# Altium PCB PlatypusDAQ.PcbDoc (part 2 of 2)
Units mil, origin at the board's own origin, x right, y up, seen from the top; angles counter-clockwise.
Board outline 10000 x 4000 mil, 4 copper layers (Top Layer, POWER, GND, Bottom Layer); 258 components, 327 nets, 1659 pads, 184 vias.
Unrouted connection lines stored in the file: 960.
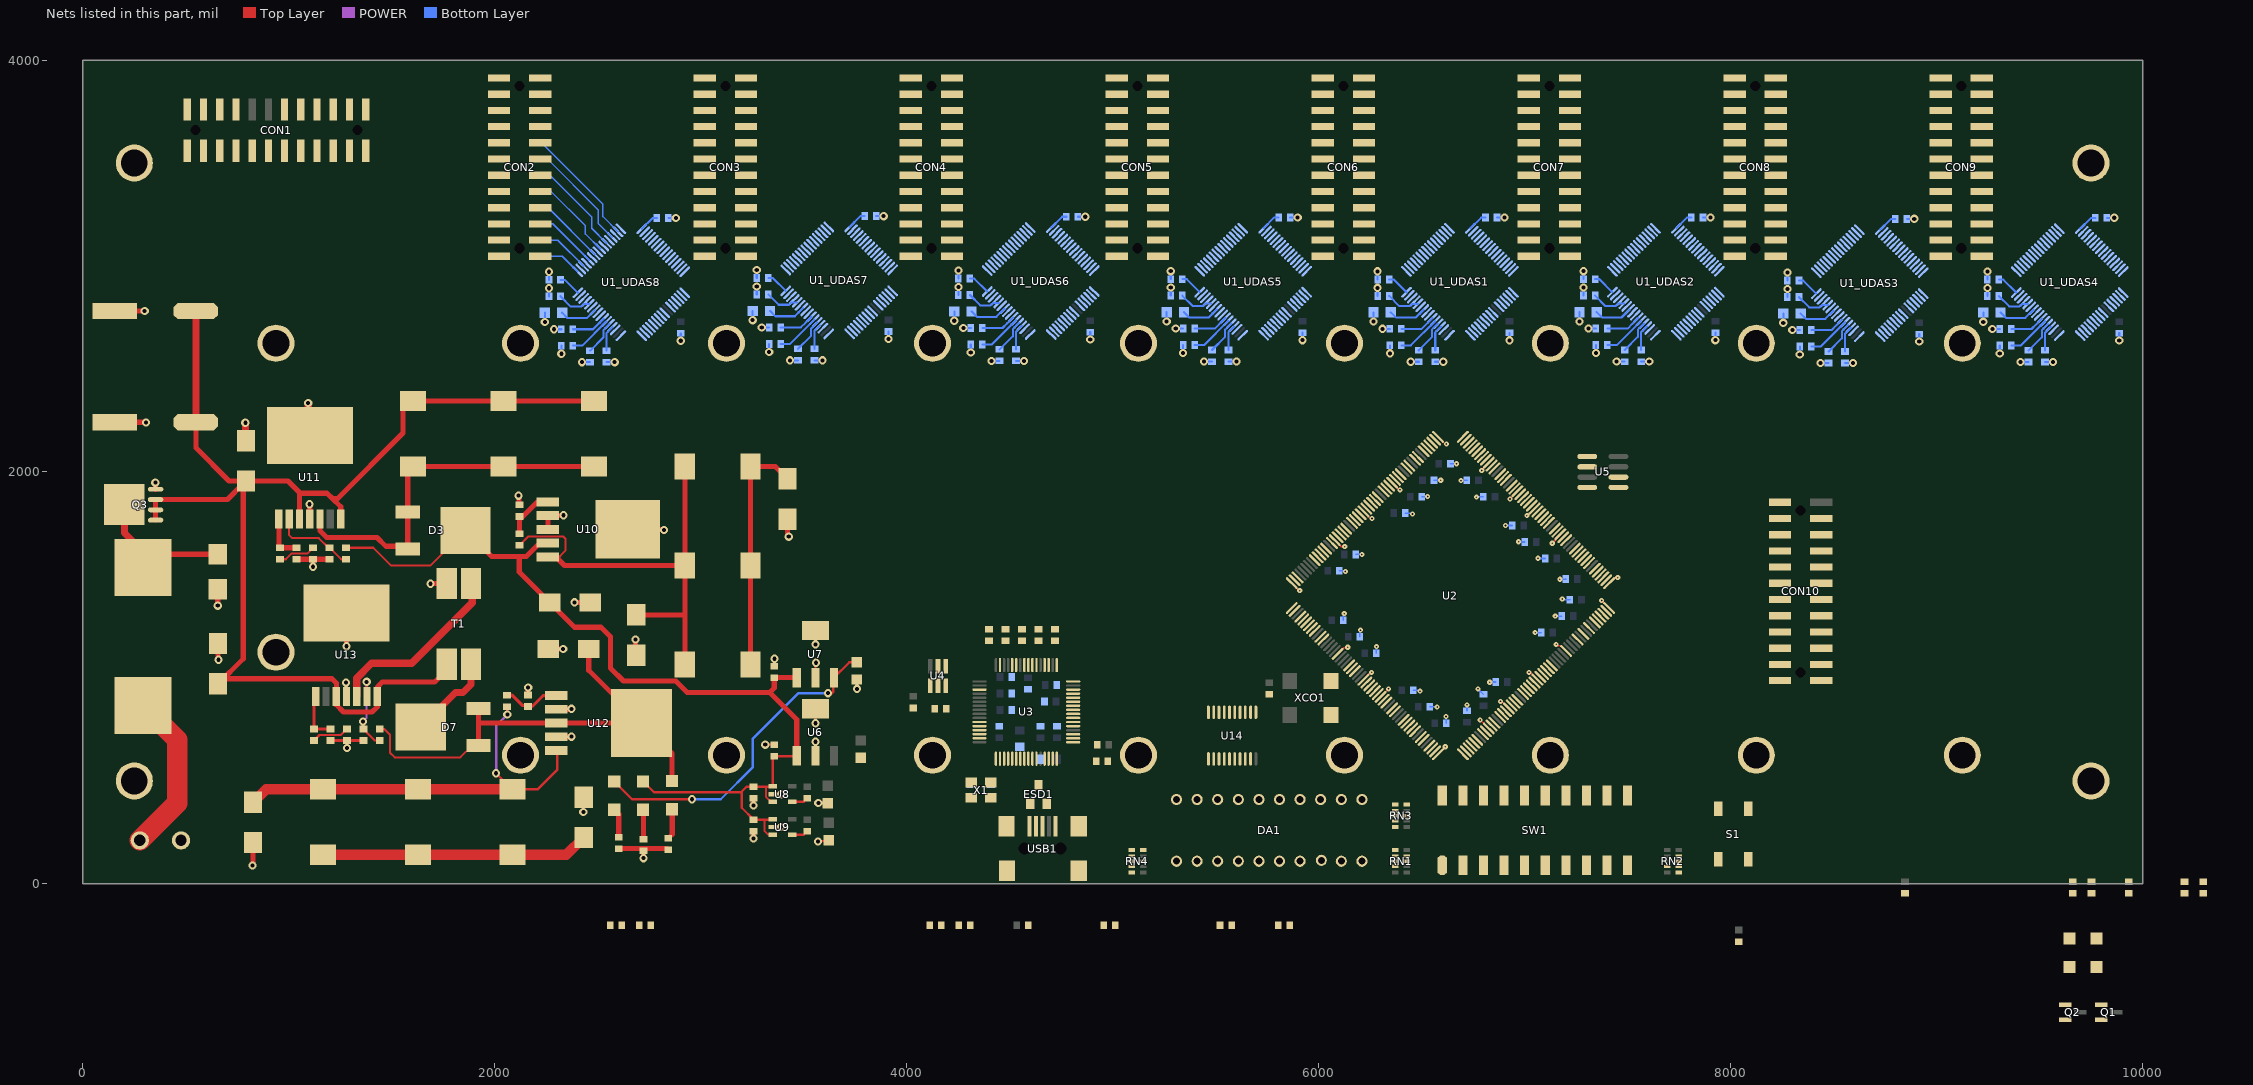
[diagram p4: the nets of this part, all layers, seen from the top]

## Via types
v1: diameter 40, hole 20, Top Layer to Bottom Layer, 117 vias
v2: diameter 25, hole 8, Top Layer to Bottom Layer, 67 vias

## Nets (pads, with @x,y where several pads share a name; then routed paths per layer and width w, separated by ;. In a path a pad name is that pad's centre, name@x,y a point inside that pad or via, vN(x,y) a via of type N, cw(c..) or ccw(c..) an arc to the next point about the centre after c; other vN are vias at no path point) (continued)
5V: C3_UDAS1.2 C3_UDAS2.2 C3_UDAS3.2 C3_UDAS4.2 C3_UDAS5.2 C3_UDAS6.2 C3_UDAS7.2 C3_UDAS8.2 C4_UDAS1.2 C4_UDAS2.2 C4_UDAS3.2 C4_UDAS4.2 C4_UDAS5.2 C4_UDAS6.2 C4_UDAS7.2 C4_UDAS8.2 C5_UDAS1.2 C5_UDAS2.2 C5_UDAS3.2 C5_UDAS4.2 C5_UDAS5.2 C5_UDAS6.2 C5_UDAS7.2 C5_UDAS8.2 C6_UDAS1.2 C6_UDAS2.2 C6_UDAS3.2 C6_UDAS4.2 C6_UDAS5.2 C6_UDAS6.2 C6_UDAS7.2 C6_UDAS8.2 C59.1 D4.1 U1_UDAS1.1 U1_UDAS1.37 U1_UDAS1.38 U1_UDAS1.48 U1_UDAS2.1 U1_UDAS2.37 U1_UDAS2.38 U1_UDAS2.48 U1_UDAS3.1 U1_UDAS3.37 U1_UDAS3.38 U1_UDAS3.48 U1_UDAS4.1 U1_UDAS4.37 U1_UDAS4.38 U1_UDAS4.48 U1_UDAS5.1 U1_UDAS5.37 U1_UDAS5.38 U1_UDAS5.48 U1_UDAS6.1 U1_UDAS6.37 U1_UDAS6.38 U1_UDAS6.48 U1_UDAS7.1 U1_UDAS7.37 U1_UDAS7.38 U1_UDAS7.48 U1_UDAS8.1 U1_UDAS8.37 U1_UDAS8.38 U1_UDAS8.48 U7.3 | length 6275.3
  Top Layer w12: D4.1@2580,497.8 2666.8,411 v1(2958,411) ; v1@3630,919 3643,932 3643,997.64 U7.3@3647.35,1001.99 3721.52,1076.17 C59.1@3756.8,1076.17
  Bottom Layer w10: C6_UDAS8.2@2319,2933 2340.6,2933 U1_UDAS8.48@2403.4,2870.19 ; C5_UDAS8.2@2379,2613 2424.6,2613 U1_UDAS8.38@2542.6,2731 ; C4_UDAS8.2@2463,2589 2527,2653 2527,2687.56 U1_UDAS8.37@2556.52,2717.08 ; U1_UDAS8.1@2713.81,3180.6 2766.21,3233 C3_UDAS8.2@2787,3233 ; C6_UDAS7.2@3328,2942 3349.6,2942 U1_UDAS7.48@3412.4,2879.19 ; C5_UDAS7.2@3388,2622 3433.6,2622 U1_UDAS7.38@3551.6,2740 ; C4_UDAS7.2@3472,2598 3536,2662 3536,2696.56 U1_UDAS7.37@3565.52,2726.08 ; U1_UDAS7.1@3722.81,3189.6 3775.21,3242 C3_UDAS7.2@3796,3242 ; C6_UDAS6.2@4307,2939 4328.6,2939 U1_UDAS6.48@4391.4,2876.19 ; C5_UDAS6.2@4367,2619 4412.6,2619 U1_UDAS6.38@4530.6,2737 ; C4_UDAS6.2@4451,2595 4515,2659 4515,2693.56 U1_UDAS6.37@4544.52,2723.08 ; U1_UDAS6.1@4701.81,3186.6 4754.21,3239 C3_UDAS6.2@4775,3239 ; C6_UDAS5.2@5338,2936 5359.6,2936 U1_UDAS5.48@5422.4,2873.19 ; C5_UDAS5.2@5398,2616 5443.6,2616 U1_UDAS5.38@5561.6,2734 ; C4_UDAS5.2@5482,2592 5546,2656 5546,2690.56 U1_UDAS5.37@5575.52,2720.08 ; U1_UDAS5.1@5732.81,3183.6 5785.21,3236 C3_UDAS5.2@5806,3236 ; C6_UDAS1.2@6342,2935 6363.6,2935 U1_UDAS1.48@6426.4,2872.19 ; C5_UDAS1.2@6402,2615 6447.6,2615 U1_UDAS1.38@6565.6,2733 ; C4_UDAS1.2@6486,2591 6550,2655 6550,2689.56 U1_UDAS1.37@6579.52,2719.08 ; U1_UDAS1.1@6736.81,3182.6 6789.21,3235 C3_UDAS1.2@6810,3235 ; C6_UDAS2.2@7342,2936 7363.6,2936 U1_UDAS2.48@7426.4,2873.19 ; C5_UDAS2.2@7402,2616 7447.6,2616 U1_UDAS2.38@7565.6,2734 ; C4_UDAS2.2@7486,2592 7550,2656 7550,2690.56 U1_UDAS2.37@7579.52,2720.08 ; U1_UDAS2.1@7736.81,3183.6 7789.21,3236 C3_UDAS2.2@7810,3236 ; C6_UDAS3.2@8332,2929 8353.6,2929 U1_UDAS3.48@8416.4,2866.19 ; C5_UDAS3.2@8392,2609 8437.6,2609 U1_UDAS3.38@8555.6,2727 ; C4_UDAS3.2@8476,2585 8540,2649 8540,2683.56 U1_UDAS3.37@8569.52,2713.08 ; U1_UDAS3.1@8726.81,3176.6 8779.21,3229 C3_UDAS3.2@8800,3229 ; C6_UDAS4.2@9303,2934 9324.6,2934 U1_UDAS4.48@9387.4,2871.19 ; C5_UDAS4.2@9363,2614 9408.6,2614 U1_UDAS4.38@9526.6,2732 ; C4_UDAS4.2@9447,2590 9511,2654 9511,2688.56 U1_UDAS4.37@9540.52,2718.08 ; U1_UDAS4.1@9697.81,3181.6 9750.21,3234 C3_UDAS4.2@9771,3234
  Bottom Layer w12: v1(2958,411) 3097,411 3253,567 3253,705 3474,926 v1(3618,926)
+10V: C60.1 CON1.19 CON1.21 CON2.20 CON3.20 CON4.20 CON5.20 CON6.20 CON7.20 CON8.20 CON9.20 L5.1 L7.1 L8.1 | length 1164.9
  Top Layer w25: L8.1@3241.8,1066.17 L5.1@3241.8,1546.17 L7.1@3241.8,2026.17 3361.8,2026.17 C60.1@3421.8,1966.17
+12V: C56.2 C57.2 C62.1 C72.2 C75.2 D3.K D5.1 R15.2 U6.1 U7.1 U8.1 U8.3 U9.1 U9.3 U10.4 | length 4678.2
  Top Layer w10: R15.2@1277.8,1632.17 1409.83,1632.17 1497,1545 1686.63,1545 D3.K@1857.8,1716.17 ; D5.1@2720,497.8 2772.8,445 3196,445 3199,448 ; 3308,312.17 3309,312.17 3309,258 3328.24,238.76 U9.3@3349.55,238.76 ; 3316,472.17 3316,423.65 3340.89,398.76 U8.3@3349.55,398.76
  Top Layer w12: 3308,312.17 C57.2@3256.8,312.17 3199,369.96 3199,448 3223.17,472.17 C56.2@3256.8,472.17 3316,472.17 3348.15,472.17 U8.1@3349.55,473.57 3349.55,612.92 C75.2@3356.8,620.17 3464.42,620.17 U6.1@3466.24,621.99 ; 3309,312.17 3348.15,312.17 U9.1@3349.55,313.57 ; U7.1@3464.42,1000.17 U7.1@3466.24,1001.99
  Top Layer w25: D3.K@1857.8,1716.17 1984.96,1589 2119,1589 ; U10.4@2220,1656 2153,1589 2119,1589 ; U6.1@3466.24,621.99 3466.24,797.76 3335,929 ; U7.1@3466.24,1001.99 3358.62,1001.99 C72.2@3356.8,1000.17 3356.8,950.8 3335,929 ; 2119,1589 2119,1513.96 C62.1@2266.8,1366.17 2386.96,1246 2516,1246 2561,1201 2561,1048 2624.33,984.67 2878.33,984.67 2934,929 3335,929
-10V: C70.2 CON1.20 CON1.22 CON2.19 CON3.19 CON4.19 CON5.19 CON6.19 CON7.19 CON8.19 CON9.19 L9.1 L10.1 L11.1 | length 1299.8
  Top Layer w50: L9.1@1166.8,141.17 L10.1@1626.8,141.17 L11.1@2086.8,141.17 2347.8,141.17 C70.2@2431.8,225.17
-12V: C71.2 D6.2 D7.A R23.2 U12.3 U12.6 | length 2392.1
  Top Layer w10: R23.2@1441.8,752.17 1463.83,752.17 1491,725 1491,637 1514,614 1833,614 1890.01,671.01 D7.A@1921.24,671.01
  Top Layer w25: D7.A@1921.24,671.01 1921.24,786 ; D7.A@1921.24,851.32 1921.24,786 ; C71.2@2456,1140 2456,1036.96 U12.6@2711.8,781.17 ; D6.2@2860,500 2860,632.96 U12.6@2711.8,781.17 ; 1921.24,786 1926.08,781.17 U12.3@2297.7,781.17 U12.6@2711.8,781.17
A0: CON2.22 CON3.22 CON4.22 CON5.22 CON6.22 CON7.22 CON8.22 CON9.22 U2.56
A1: CON2.24 CON3.24 CON4.24 CON5.24 CON6.24 CON7.24 CON8.24 CON9.24 U2.60
BSY1: U1_UDAS8.14 U2.80
BSY2: U1_UDAS7.14 U2.110
BSY3: U1_UDAS6.14 U2.118
BSY4: U1_UDAS5.14 U2.124
BSY5: U1_UDAS1.14 U2.130
BSY6: U1_UDAS2.14 U2.142
BSY7: U1_UDAS3.14 U2.148
BSY8: U1_UDAS4.14 U2.154
CLKOUT: U2.184 U3.32
CONVST: U1_UDAS1.9 U1_UDAS1.10 U1_UDAS2.9 U1_UDAS2.10 U1_UDAS3.9 U1_UDAS3.10 U1_UDAS4.9 U1_UDAS4.10 U1_UDAS5.9 U1_UDAS5.10 U1_UDAS6.9 U1_UDAS6.10 U1_UDAS7.9 U1_UDAS7.10 U1_UDAS8.9 U1_UDAS8.10 U2.93
DASCS1: U1_UDAS8.13 U2.62
DASCS2: U1_UDAS7.13 U2.63
DASCS3: U1_UDAS6.13 U2.64
DASCS4: U1_UDAS5.13 U2.65
DASCS5: U1_UDAS1.13 U2.68
DASCS6: U1_UDAS2.13 U2.69
DASCS7: U1_UDAS3.13 U2.74
DASCS8: U1_UDAS4.13 U2.75
DASRD: U1_UDAS1.12 U1_UDAS2.12 U1_UDAS3.12 U1_UDAS4.12 U1_UDAS5.12 U1_UDAS6.12 U1_UDAS7.12 U1_UDAS8.12 U2.100
DASRST: U1_UDAS1.11 U1_UDAS2.11 U1_UDAS3.11 U1_UDAS4.11 U1_UDAS5.11 U1_UDAS6.11 U1_UDAS7.11 U1_UDAS8.11 U2.97
DASSTBY: U1_UDAS1.7 U1_UDAS2.7 U1_UDAS3.7 U1_UDAS4.7 U1_UDAS5.7 U1_UDAS6.7 U1_UDAS7.7 U1_UDAS8.7
DB0: U1_UDAS1.16 U1_UDAS2.16 U1_UDAS3.16 U1_UDAS4.16 U1_UDAS5.16 U1_UDAS6.16 U1_UDAS7.16 U1_UDAS8.16 U2.54
DB1: U1_UDAS1.17 U1_UDAS2.17 U1_UDAS3.17 U1_UDAS4.17 U1_UDAS5.17 U1_UDAS6.17 U1_UDAS7.17 U1_UDAS8.17 U2.57
DB2: U1_UDAS1.18 U1_UDAS2.18 U1_UDAS3.18 U1_UDAS4.18 U1_UDAS5.18 U1_UDAS6.18 U1_UDAS7.18 U1_UDAS8.18 U2.58
DB3: U1_UDAS1.19 U1_UDAS2.19 U1_UDAS3.19 U1_UDAS4.19 U1_UDAS5.19 U1_UDAS6.19 U1_UDAS7.19 U1_UDAS8.19 U2.71
DB4: U1_UDAS1.20 U1_UDAS2.20 U1_UDAS3.20 U1_UDAS4.20 U1_UDAS5.20 U1_UDAS6.20 U1_UDAS7.20 U1_UDAS8.20 U2.72
DB5: U1_UDAS1.21 U1_UDAS2.21 U1_UDAS3.21 U1_UDAS4.21 U1_UDAS5.21 U1_UDAS6.21 U1_UDAS7.21 U1_UDAS8.21 U2.76
DB6: U1_UDAS1.22 U1_UDAS2.22 U1_UDAS3.22 U1_UDAS4.22 U1_UDAS5.22 U1_UDAS6.22 U1_UDAS7.22 U1_UDAS8.22 U2.77
DB7: U1_UDAS1.24 U1_UDAS2.24 U1_UDAS3.24 U1_UDAS4.24 U1_UDAS5.24 U1_UDAS6.24 U1_UDAS7.24 U1_UDAS8.24 U2.78
DB8: U1_UDAS1.25 U1_UDAS2.25 U1_UDAS3.25 U1_UDAS4.25 U1_UDAS5.25 U1_UDAS6.25 U1_UDAS7.25 U1_UDAS8.25 U2.81
DB9: U1_UDAS1.27 U1_UDAS2.27 U1_UDAS3.27 U1_UDAS4.27 U1_UDAS5.27 U1_UDAS6.27 U1_UDAS7.27 U1_UDAS8.27 U2.82
DB10: U1_UDAS1.28 U1_UDAS2.28 U1_UDAS3.28 U1_UDAS4.28 U1_UDAS5.28 U1_UDAS6.28 U1_UDAS7.28 U1_UDAS8.28 U2.83
DB11: U1_UDAS1.29 U1_UDAS2.29 U1_UDAS3.29 U1_UDAS4.29 U1_UDAS5.29 U1_UDAS6.29 U1_UDAS7.29 U1_UDAS8.29 U2.84
DB12: U1_UDAS1.30 U1_UDAS2.30 U1_UDAS3.30 U1_UDAS4.30 U1_UDAS5.30 U1_UDAS6.30 U1_UDAS7.30 U1_UDAS8.30 U2.86
DB13: U1_UDAS1.31 U1_UDAS2.31 U1_UDAS3.31 U1_UDAS4.31 U1_UDAS5.31 U1_UDAS6.31 U1_UDAS7.31 U1_UDAS8.31 U2.89
DB14: U1_UDAS1.32 U1_UDAS2.32 U1_UDAS3.32 U1_UDAS4.32 U1_UDAS5.32 U1_UDAS6.32 U1_UDAS7.32 U1_UDAS8.32 U2.91
DB15: U1_UDAS1.33 U1_UDAS2.33 U1_UDAS3.33 U1_UDAS4.33 U1_UDAS5.33 U1_UDAS6.33 U1_UDAS7.33 U1_UDAS8.33 U2.101
DBRD1: CON2.23 U2.120
DBRD2: CON3.23 U2.119
DBRD3: CON4.23 U2.122
DBRD4: CON5.23 U2.123
DBRD5: CON6.23 U2.126
DBRD6: CON7.23 U2.127
DBRD7: CON8.23
DBRD8: CON9.23 U2.129
DONE: JO1.2 U2.104
FLASH_CS: U2.55 U5.1
FLASH_MISO: U2.87 U5.2
FLASH_MOSI: U2.61 U5.5
FPGA_CLK: U2.177 XCO1.3
FPGA_CLK_OUT: CON10.21 U2.178
FPGA_SCK: U2.103 U5.6
FRST1: U1_UDAS8.15 U2.99
FRST2: U1_UDAS7.15
FRST3: U1_UDAS6.15
FRST4: U1_UDAS5.15
FRST5: U1_UDAS1.15
FRST6: U1_UDAS2.15
FRST7: U1_UDAS3.15
FRST8: U1_UDAS4.15
GND: C1_UDAS1.1 C1_UDAS2.1 C1_UDAS3.1 C1_UDAS4.1 C1_UDAS5.1 C1_UDAS6.1 C1_UDAS7.1 C1_UDAS8.1 C2_UDAS1.1 C2_UDAS2.1 C2_UDAS3.1 C2_UDAS4.1 C2_UDAS5.1 C2_UDAS6.1 C2_UDAS7.1 C2_UDAS8.1 C3_UDAS1.1 C3_UDAS2.1 C3_UDAS3.1 C3_UDAS4.1 C3_UDAS5.1 C3_UDAS6.1 C3_UDAS7.1 C3_UDAS8.1 C4_UDAS1.1 C4_UDAS2.1 C4_UDAS3.1 C4_UDAS4.1 C4_UDAS5.1 C4_UDAS6.1 C4_UDAS7.1 C4_UDAS8.1 C5_UDAS1.1 C5_UDAS2.1 C5_UDAS3.1 C5_UDAS4.1 C5_UDAS5.1 C5_UDAS6.1 C5_UDAS7.1 C5_UDAS8.1 C6_UDAS1.1 C6_UDAS2.1 C6_UDAS3.1 C6_UDAS4.1 C6_UDAS5.1 C6_UDAS6.1 C6_UDAS7.1 C6_UDAS8.1 C7_UDAS1.1 C7_UDAS2.1 C7_UDAS3.1 C7_UDAS4.1 C7_UDAS5.1 C7_UDAS6.1 C7_UDAS7.1 C7_UDAS8.1 C8_UDAS1.1 C8_UDAS2.1 C8_UDAS3.1 C8_UDAS4.1 C8_UDAS5.1 C8_UDAS6.1 C8_UDAS7.1 C8_UDAS8.1 C9_UDAS1.1 C9_UDAS2.1 C9_UDAS3.1 C9_UDAS4.1 C9_UDAS5.1 C9_UDAS6.1 C9_UDAS7.1 C9_UDAS8.1 C10.1 C11.1 C12.1 C13.1 C14.1 C15.1 C16.1 C17.1 C18.1 C19.1 C20.1 C21.1 C22.1 C23.1 C24.1 C25.1 C26.1 C27.1 C28.1 C29.2 C30.1 C31.1 C32.1 C33.1 C34.1 C35.1 C36.1 C37.1 C38.1 C39.1 C40.1 C41.1 C42.1 C43.1 C44.1 C45.1 C46.1 C47.1 C48.1 C49.1 C50.1 C51.1 C54.2 C55.2 C56.1 C57.1 C58.2 C59.2 C60.2 C61.2 C62.2 C63.2 C64.2 C65.2 C66.2 C68.1 C69.1 C70.1 C71.1 C72.1 C74.1 C75.1 CON1.17 CON1.18 CON1.23 CON1.24 CON2.1 CON2.3 CON2.5 CON2.7 CON2.9 CON2.11 CON2.13 CON2.15 CON2.17 CON2.18 CON3.1 CON3.3 CON3.5 CON3.7 CON3.9 CON3.11 CON3.13 CON3.15 CON3.17 CON3.18 CON4.1 CON4.3 CON4.5 CON4.7 CON4.9 CON4.11 CON4.13 CON4.15 CON4.17 CON4.18 CON5.1 CON5.3 CON5.5 CON5.7 CON5.9 CON5.11 CON5.13 CON5.15 CON5.17 CON5.18 CON6.1 CON6.3 CON6.5 CON6.7 CON6.9 CON6.11 CON6.13 CON6.15 CON6.17 CON6.18 CON7.1 CON7.3 CON7.5 CON7.7 CON7.9 CON7.11 CON7.13 CON7.15 CON7.17 CON7.18 CON8.1 CON8.3 CON8.5 CON8.7 CON8.9 CON8.11 CON8.13 CON8.15 CON8.17 CON8.18 CON9.1 CON9.3 CON9.5 CON9.7 CON9.9 CON9.11 CON9.13 CON9.15 CON9.17 CON9.18 CON10.24 ESD1.3 M1.0 M2.0 M3.0 M4.0 M5.0 M6.0 M7.0 M8.0 M9.0 M10.0 M11.0 M12.0 M13.0 M14.0 M15.0 M16.0 M17.0 M18.0 M19.0 M20.0 M21.0 M22.0 Q3.G R1.2 R2.2 R3.2 R12.2 R14.1 R16.1 R17.1 R18.2 R19.1 R20.1 R21.2 R24.1 R25.1 RN3.COM RN4.COM S1.3 S1.4 SW1.1 SW1.2 SW1.3 SW1.4 SW1.5 SW1.6 SW1.7 SW1.8 SW1.9 SW1.10 T1.4 TVS1.C U1_UDAS1.2 U1_UDAS1.6 U1_UDAS1.26 U1_UDAS1.35 U1_UDAS1.40 U1_UDAS1.41 U1_UDAS1.43 U1_UDAS1.46 U1_UDAS1.47 U1_UDAS1.50 U1_UDAS1.52 U1_UDAS1.54 U1_UDAS1.56 U1_UDAS1.58 U1_UDAS1.60 U1_UDAS1.62 U1_UDAS1.64 U1_UDAS2.2 U1_UDAS2.6 U1_UDAS2.26 U1_UDAS2.35 U1_UDAS2.40 U1_UDAS2.41 U1_UDAS2.43 U1_UDAS2.46 U1_UDAS2.47 U1_UDAS2.50 U1_UDAS2.52 U1_UDAS2.54 U1_UDAS2.56 U1_UDAS2.58 U1_UDAS2.60 U1_UDAS2.62 U1_UDAS2.64 U1_UDAS3.2 U1_UDAS3.6 U1_UDAS3.26 U1_UDAS3.35 U1_UDAS3.40 U1_UDAS3.41 U1_UDAS3.43 U1_UDAS3.46 U1_UDAS3.47 U1_UDAS3.50 U1_UDAS3.52 U1_UDAS3.54 U1_UDAS3.56 U1_UDAS3.58 U1_UDAS3.60 U1_UDAS3.62 U1_UDAS3.64 U1_UDAS4.2 U1_UDAS4.6 U1_UDAS4.26 U1_UDAS4.35 U1_UDAS4.40 U1_UDAS4.41 U1_UDAS4.43 U1_UDAS4.46 U1_UDAS4.47 U1_UDAS4.50 U1_UDAS4.52 U1_UDAS4.54 U1_UDAS4.56 U1_UDAS4.58 U1_UDAS4.60 U1_UDAS4.62 U1_UDAS4.64 U1_UDAS5.2 U1_UDAS5.6 U1_UDAS5.26 U1_UDAS5.35 U1_UDAS5.40 U1_UDAS5.41 U1_UDAS5.43 U1_UDAS5.46 U1_UDAS5.47 U1_UDAS5.50 U1_UDAS5.52 U1_UDAS5.54 U1_UDAS5.56 U1_UDAS5.58 U1_UDAS5.60 U1_UDAS5.62 U1_UDAS5.64 U1_UDAS6.2 U1_UDAS6.6 U1_UDAS6.26 U1_UDAS6.35 U1_UDAS6.40 U1_UDAS6.41 U1_UDAS6.43 U1_UDAS6.46 U1_UDAS6.47 U1_UDAS6.50 U1_UDAS6.52 U1_UDAS6.54 U1_UDAS6.56 U1_UDAS6.58 U1_UDAS6.60 U1_UDAS6.62 U1_UDAS6.64 U1_UDAS7.2 U1_UDAS7.6 U1_UDAS7.26 U1_UDAS7.35 U1_UDAS7.40 U1_UDAS7.41 U1_UDAS7.43 U1_UDAS7.46 U1_UDAS7.47 U1_UDAS7.50 U1_UDAS7.52 U1_UDAS7.54 U1_UDAS7.56 U1_UDAS7.58 U1_UDAS7.60 U1_UDAS7.62 U1_UDAS7.64 U1_UDAS8.2 U1_UDAS8.6 U1_UDAS8.26 U1_UDAS8.35 U1_UDAS8.40 U1_UDAS8.41 U1_UDAS8.43 U1_UDAS8.46 U1_UDAS8.47 U1_UDAS8.50 U1_UDAS8.52 U1_UDAS8.54 U1_UDAS8.56 U1_UDAS8.58 U1_UDAS8.60 U1_UDAS8.62 U1_UDAS8.64 U2.10 U2.17 U2.27 U2.37 U2.52 U2.53 U2.70 U2.79 U2.85 U2.95 U2.105 U2.121 U2.131 U2.141 U2.156 U2.173 U2.182 U2.188 U2.198 U2.208 U3.1 U3.5 U3.10 U3.11 U3.13 U3.15 U3.25 U3.35 U3.47 U3.51 U4.2 U5.4 U6.2 U6.4 U7.2 U7.4 U8.2 U9.2 U10.2 U10.3 U10.6 U11.4 U11.8 U12.2 U12.4 U13.4 U13.8 U14.10 USB1.5 VPWR1.1 X1.2 X1.4 XCO1.2 | length 8414
  Top Layer w8: U2.156@5869.56,1460.55 5906.11,1424 v2(5908,1424) ; U2.141@6078.35,1669.34 6110.19,1637.5 v2(6126.96,1637.5) ; U2.173@6092.27,1116.74 6122.53,1147 6139,1147 v2(6141,1149) ; U2.182@6217.55,991.46 6253.08,1027 v2(6257,1027) ; U2.131@6217.55,1808.54 6252.08,1774 v2(6259,1774) ; U2.188@6301.06,907.95 6301.06,909.06 v2(6339,947) ; U2.121@6356.74,1947.73 6391.47,1913 v2(6395,1913) ; U2.208@6579.45,629.56 6615,665.11 v2(6615,666) ; U2.105@6579.45,2170.44 6613.89,2136 v2(6620,2136) ; v2(6784,796) 6784.66,796 U2.10@6825.82,754.83 ; v2(6792,2007) 6792,2011.34 U2.95@6825.82,2045.17 ; v2(6883,886) 6889.53,886 U2.17@6923.26,852.27 ; v2(6929,1869) 6929,1869.95 U2.85@6965.02,1905.97 ; v2(7011,1788) 7014.08,1788 U2.79@7048.54,1822.45 ; v2(7021,1027) 7026.92,1027 U2.27@7062.45,991.47 ; v2(7134,1654) 7173.81,1693.81 U2.70@7173.81,1697.18 ; v2(7153,1163) 7159,1157 7175.31,1157 U2.37@7201.65,1130.66 ; v2(7374,1376) 7374,1375.89 U2.52@7410.44,1339.45 ; U2.53@7410.44,1460.55 7436.89,1487 v2(7452,1487)
  Top Layer w10: v1@2242,2729 v1(2243,2728) ; v1@2259,2888 v1(2263,2892) ; v1(2287,2693) v1@2288,2692 ; v1(2424,2533) v1@2432,2525 ; v1(2430,349) 2432,349 2431.8,349.2 C70.1@2431.8,421.17 ; v1@2877,3235 v1(2879,3233) ; v1(2903,2637) v1@2903,2648 ; v1@3251,2738 v1(3252,2737) ; v1@3268,2897 v1(3272,2901) ; v1(3296,2702) v1@3297,2701 ; v1(3313,676) 3315,676 3318,679 3320.83,676.17 C75.1@3356.8,676.17 ; U9.2@3349.55,276.17 3380.83,276.17 3383,274 3385,276 v1(3390,276) ; U8.2@3349.55,436.17 3388.83,436.17 v1(3390,435) ; C72.1@3356.8,1056.17 3356.8,1091.8 v1(3358,1093) ; v1(3433,2542) v1@3441,2534 ; U6.2@3556.8,621.99 3556.8,689.8 v1(3557,690) ; U6.4@3556.8,850.34 3556.8,780.2 v1(3557,780) ; U7.2@3556.8,1001.99 3556.8,1071.8 v1(3559,1074) ; U7.4@3556.8,1230.34 3556.8,1163.2 v1(3557,1163) ; v1(3569,206) 3569,208 3570,209 3618.63,209 C55.2@3621.8,212.17 ; v1(3571,393) 3571.83,392.17 C54.2@3616.8,392.17 ; C59.2@3756.8,992.17 3756.8,948.2 v1(3758,947) ; v1@3886,3244 v1(3888,3242) ; v1(3912,2646) v1@3912,2657 ; v1@4230,2735 v1(4231,2734) ; v1@4247,2894 v1(4251,2898) ; v1(4275,2699) v1@4276,2698 ; v1(4412,2539) v1@4420,2531 ; v1@4865,3241 v1(4867,3239) ; v1(4891,2643) v1@4891,2654 ; v1@5261,2732 v1(5262,2731) ; v1@5278,2891 v1(5282,2895) ; v1(5306,2696) v1@5307,2695 ; v1(5443,2536) v1@5451,2528 ; v1@5896,3238 v1(5898,3236) ; v1(5922,2640) v1@5922,2651 ; v1@6265,2731 v1(6266,2730) ; v1@6282,2890 v1(6286,2894) ; v1(6310,2695) v1@6311,2694 ; v1(6447,2535) v1@6455,2527 ; v1@6900,3237 v1(6902,3235) ; v1(6926,2639) v1@6926,2650 ; v1@7265,2732 v1(7266,2731) ; v1@7282,2891 v1(7286,2895) ; v1(7310,2696) v1@7311,2695 ; v1(7447,2536) v1@7455,2528 ; v1@7900,3238 v1(7902,3236) ; v1(7926,2640) v1@7926,2651 ; v1@8255,2725 v1(8256,2724) ; v1@8272,2884 v1(8276,2888) ; v1(8300,2689) v1@8301,2688 ; v1(8437,2529) v1@8445,2521 ; v1@8890,3231 v1(8892,3229) ; v1(8916,2633) v1@8916,2644 ; v1@9226,2730 v1(9227,2729) ; v1@9243,2889 v1(9247,2893) ; v1(9271,2694) v1@9272,2693 ; v1(9408,2534) v1@9416,2526 ; v1@9861,3236 v1(9863,3234) ; v1(9887,2638) v1@9887,2649
  Top Layer w15: C74.1@1201.8,696.17 R25.1@1281.8,696.17 ; v1(1278,977) 1278,973 1280,971 U13.4@1280,910 ; v1(1283,660) 1281.8,661.2 R25.1@1281.8,696.17 ; R24.1@1361.8,696.17 R25.1@1281.8,696.17
  Top Layer w25: C64.2@154.95,2241.17 304.83,2241.17 v1(306,2240) ; C65.2@154.95,2781.17 v1(300.17,2781.17) ; v1(352,1948) 353.17,1946.83 Q3.G@353.17,1916.17 ; v1(655,1351) TVS1.C@654.99,1430.85 ; C61.2@656.8,1167.17 656.8,1089.2 v1(658,1088) ; v1(823,89) 826.8,92.8 C69.1@826.8,201.17 ; C68.1@1037.8,1576.17 R17.1@1117.8,1576.17 ; v1(1101,1843) 1104,1840 1104,1836 1101.8,1833.8 U11.4@1101.8,1771.17 ; v1(1118,1540) 1120,1542 1120,1544 1117.8,1546.2 R17.1@1117.8,1576.17 ; R16.1@1197.8,1576.17 R17.1@1117.8,1576.17 ; v1(1280,1154) U13.8@1280,1315.51 ; v1(1688,1457) 1688,1458 1688.1,1457.9 T1.4@1766.8,1457.9 ; R14.1@2117,1839 v1@2117,1874.04 ; R18.2@2161.8,917.17 2161.8,953.8 v1(2162,954) ; U10.3@2257.7,1721.17 2257.7,1763 U10.2@2257.7,1788.09 2331.09,1788.09 v1(2333,1790) ; C71.1@2260,1140 2331,1140 v1(2332,1141) ; U12.4@2297.7,714.24 2372.24,714.24 v1(2373,715) ; U12.2@2297.7,848.09 2371.09,848.09 v1(2373,850) ; v1(2387,1367) 2387.83,1366.17 C62.2@2462.8,1366.17 ; R19.1@2601.8,171.17 2835.8,171.17 R21.2@2841.8,165.17 ; U10.6@2645.5,1721.17 2818.83,1721.17 v1(2822,1718) ; v1(2683,1186) 2683,1113.96 C63.2@2686.8,1110.17 ; R20.1@2721.8,161.17 2721.8,127.2 2722,127 v1(2722,125) ; v1(3256,220) 3256,221 3256.8,221.8 C57.1@3256.8,256.17 ; v1(3256,380) 3255,381 3255,390 3256.8,391.8 C56.1@3256.8,416.17 ; C60.2@3421.8,1770.17 3421.8,1685.2 3426,1681 3426,1685 v1(3427,1686)
  Top Layer w35: v1(789,2239) 789,2154.96 C66.2@791.8,2152.17 ; v1(1094,2335) 1094,2307 1101.8,2299.2 U11.8@1101.8,2176.68
  Bottom Layer w8: C31.1@6100,1520 6127,1520 v2(6130,1517) ; C32.1@6120,1280 6120,1308 v2(6124,1312) ; C47.1@6180,1600 6209,1600 v2(6210,1599) ; C27.1@6200,1200 6200,1229 v2(6203,1232) ; C48.1@6280,1120 6280,1151 v2(6281,1152) ; C46.1@6420,1800 6452,1800 v2(6456,1796) ; C49.1@6460,940 6488,940 v2(6492,936) ; C26.1@6500,1880 6528,1880 v2(6529,1881) ; C33.1@6540,860 6574,860 v2(6575,859) ; C45.1@6560,1960 v2(6593,1960) ; v2(6618,813) 6619,813 6620,814 C50.1@6620,780 ; C30.1@6640,2040 v2(6669,2040) ; v2(6691,1958) 6693,1960 C44.1@6720,1960 ; C41.1@6720,840 v2(6720,869) ; v2(6766,1878) 6768,1880 C39.1@6800,1880 ; v2(6774,947) 6776,945 6777,945 6777,943 C24.1@6800,920 ; v2(6831,979) 6832,978 6834,980 C34.1@6860,980 ; v2(6907,1740) 6906,1741 6903,1741 6904,1740 C38.1@6940,1740 ; v2(6971,1661) 6972,1660 C25.1@7000,1660 ; v2(7051,1220) C35.1@7080,1220 ; v2(7065,1581) 7066,1580 C43.1@7100,1580 ; v2(7149,1300) C42.1@7180,1300 ; v2(7171,1479) 7199,1479 C37.1@7200,1480 ; v2(7183,1383) 7186,1380 C36.1@7220,1380
  Bottom Layer w10: v1(2243,2728) C2_UDAS8.1@2243,2773 ; C9_UDAS8.1@2263,2853 v1(2263,2892) ; C6_UDAS8.1@2263,2933 v1(2263,2972) ; v1(2287,2693) C8_UDAS8.1@2323,2693 ; v1(2323,2574) C5_UDAS8.1@2323,2613 ; v1(2424,2533) C4_UDAS8.1@2463,2533 ; C7_UDAS8.1@2543,2533 v1(2582,2533) ; C3_UDAS8.1@2843,3233 v1(2879,3233) ; v1(2903,2637) C1_UDAS8.1@2903,2673 ; v1(3252,2737) C2_UDAS7.1@3252,2782 ; C9_UDAS7.1@3272,2862 v1(3272,2901) ; C6_UDAS7.1@3272,2942 v1(3272,2981) ; v1(3296,2702) C8_UDAS7.1@3332,2702 ; v1(3332,2583) C5_UDAS7.1@3332,2622 ; v1(3433,2542) C4_UDAS7.1@3472,2542 ; C7_UDAS7.1@3552,2542 v1(3591,2542) ; C3_UDAS7.1@3852,3242 v1(3888,3242) ; v1(3912,2646) C1_UDAS7.1@3912,2682 ; v1(4231,2734) C2_UDAS6.1@4231,2779 ; C9_UDAS6.1@4251,2859 v1(4251,2898) ; C6_UDAS6.1@4251,2939 v1(4251,2978) ; v1(4275,2699) C8_UDAS6.1@4311,2699 ; v1(4311,2580) C5_UDAS6.1@4311,2619 ; v1(4412,2539) C4_UDAS6.1@4451,2539 ; C7_UDAS6.1@4531,2539 v1(4570,2539) ; C3_UDAS6.1@4831,3239 v1(4867,3239) ; v1(4891,2643) C1_UDAS6.1@4891,2679 ; v1(5262,2731) C2_UDAS5.1@5262,2776 ; C9_UDAS5.1@5282,2856 v1(5282,2895) ; C6_UDAS5.1@5282,2936 v1(5282,2975) ; v1(5306,2696) C8_UDAS5.1@5342,2696 ; v1(5342,2577) C5_UDAS5.1@5342,2616 ; v1(5443,2536) C4_UDAS5.1@5482,2536 ; C7_UDAS5.1@5562,2536 v1(5601,2536) ; C3_UDAS5.1@5862,3236 v1(5898,3236) ; v1(5922,2640) C1_UDAS5.1@5922,2676 ; v1(6266,2730) C2_UDAS1.1@6266,2775 ; C9_UDAS1.1@6286,2855 v1(6286,2894) ; C6_UDAS1.1@6286,2935 v1(6286,2974) ; v1(6310,2695) C8_UDAS1.1@6346,2695 ; v1(6346,2576) C5_UDAS1.1@6346,2615 ; v1(6447,2535) C4_UDAS1.1@6486,2535 ; C7_UDAS1.1@6566,2535 v1(6605,2535) ; C3_UDAS1.1@6866,3235 v1(6902,3235) ; v1(6926,2639) C1_UDAS1.1@6926,2675 ; v1(7266,2731) C2_UDAS2.1@7266,2776 ; C9_UDAS2.1@7286,2856 v1(7286,2895) ; C6_UDAS2.1@7286,2936 v1(7286,2975) ; v1(7310,2696) C8_UDAS2.1@7346,2696 ; v1(7346,2577) C5_UDAS2.1@7346,2616 ; v1(7447,2536) C4_UDAS2.1@7486,2536 ; C7_UDAS2.1@7566,2536 v1(7605,2536) ; C3_UDAS2.1@7866,3236 v1(7902,3236) ; v1(7926,2640) C1_UDAS2.1@7926,2676 ; v1(8256,2724) C2_UDAS3.1@8256,2769 ; C9_UDAS3.1@8276,2849 v1(8276,2888) ; C6_UDAS3.1@8276,2929 v1(8276,2968) ; v1(8300,2689) C8_UDAS3.1@8336,2689 ; v1(8336,2570) C5_UDAS3.1@8336,2609 ; v1(8437,2529) C4_UDAS3.1@8476,2529 ; C7_UDAS3.1@8556,2529 v1(8595,2529) ; C3_UDAS3.1@8856,3229 v1(8892,3229) ; v1(8916,2633) C1_UDAS3.1@8916,2669 ; v1(9227,2729) C2_UDAS4.1@9227,2774 ; C9_UDAS4.1@9247,2854 v1(9247,2893) ; C6_UDAS4.1@9247,2934 v1(9247,2973) ; v1(9271,2694) C8_UDAS4.1@9307,2694 ; v1(9307,2575) C5_UDAS4.1@9307,2614 ; v1(9408,2534) C4_UDAS4.1@9447,2534 ; C7_UDAS4.1@9527,2534 v1(9566,2534) ; C3_UDAS4.1@9827,3234 v1(9863,3234) ; v1(9887,2638) C1_UDAS4.1@9887,2674
  other v1: 2115,1885
HS_DB_IO0: U2.196 U3.16
HS_DB_IO1: U2.197 U3.17
HS_DB_IO2: U2.199 U3.18
HS_DB_IO3: U2.200 U3.19
HS_DB_IO4: U2.202 U3.21
HS_DB_IO5: U2.203 U3.22
HS_DB_IO6: U2.205 U3.23
HS_DB_IO7: U2.206 U3.24
LED1: DA1.10 U14.18
LED2: DA1.9 U14.17
LED3: DA1.8 U14.16
LED4: DA1.7 U14.15
LED5: DA1.6 U14.14
LED6: DA1.5 U14.13
LED7: DA1.4 U14.12
LED8: DA1.3 U14.11
LED9: DA1.2
LED10: DA1.1
LEDCTRL1: U2.187 U14.2
LEDCTRL2: U2.179 U14.3
LEDCTRL3: U2.161 U14.4
LEDCTRL4: U2.160 U14.5
LEDCTRL5: U2.163 U14.6
LEDCTRL6: U2.162 U14.7
LEDCTRL7: U2.165 U14.8
LEDCTRL8: U2.164 U14.9
LEDCTRL9: U2.168
LEDCTRL10: U2.167
LEDOE: U14.1 U14.19
NetC2_UDAS1_2: C2_UDAS1.2 U1_UDAS1.42 | length 187.1
  Bottom Layer w10: C2_UDAS1.2@6350,2775 6376,2749 6470.24,2749 U1_UDAS1.42@6509.92,2788.68
NetC2_UDAS2_2: C2_UDAS2.2 U1_UDAS2.42 | length 187.1
  Bottom Layer w10: C2_UDAS2.2@7350,2776 7376,2750 7470.24,2750 U1_UDAS2.42@7509.92,2789.68
NetC2_UDAS3_2: C2_UDAS3.2 U1_UDAS3.42 | length 187.1
  Bottom Layer w10: C2_UDAS3.2@8340,2769 8366,2743 8460.24,2743 U1_UDAS3.42@8499.92,2782.68
NetC2_UDAS4_2: C2_UDAS4.2 U1_UDAS4.42 | length 187.1
  Bottom Layer w10: C2_UDAS4.2@9311,2774 9337,2748 9431.24,2748 U1_UDAS4.42@9470.92,2787.68
NetC2_UDAS5_2: C2_UDAS5.2 U1_UDAS5.42 | length 187.1
  Bottom Layer w10: C2_UDAS5.2@5346,2776 5372,2750 5466.24,2750 U1_UDAS5.42@5505.92,2789.68
NetC2_UDAS6_2: C2_UDAS6.2 U1_UDAS6.42 | length 187.1
  Bottom Layer w10: C2_UDAS6.2@4315,2779 4341,2753 4435.24,2753 U1_UDAS6.42@4474.92,2792.68
NetC2_UDAS7_2: C2_UDAS7.2 U1_UDAS7.42 | length 187.1
  Bottom Layer w10: C2_UDAS7.2@3336,2782 3362,2756 3456.24,2756 U1_UDAS7.42@3495.92,2795.68
NetC2_UDAS8_2: C2_UDAS8.2 U1_UDAS8.42 | length 187.1
  Bottom Layer w10: C2_UDAS8.2@2327,2773 2353,2747 2447.24,2747 U1_UDAS8.42@2486.92,2786.68
NetC7_UDAS1_2: C7_UDAS1.2 U1_UDAS1.36 | length 125.5
  Bottom Layer w10: C7_UDAS1.2@6566,2591 6566,2677.73 U1_UDAS1.36@6593.44,2705.16
NetC7_UDAS2_2: C7_UDAS2.2 U1_UDAS2.36 | length 125.5
  Bottom Layer w10: C7_UDAS2.2@7566,2592 7566,2678.73 U1_UDAS2.36@7593.44,2706.16
NetC7_UDAS3_2: C7_UDAS3.2 U1_UDAS3.36 | length 125.5
  Bottom Layer w10: C7_UDAS3.2@8556,2585 8556,2671.73 U1_UDAS3.36@8583.44,2699.16
NetC7_UDAS4_2: C7_UDAS4.2 U1_UDAS4.36 | length 125.5
  Bottom Layer w10: C7_UDAS4.2@9527,2590 9527,2676.73 U1_UDAS4.36@9554.44,2704.16
NetC7_UDAS5_2: C7_UDAS5.2 U1_UDAS5.36 | length 125.5
  Bottom Layer w10: C7_UDAS5.2@5562,2592 5562,2678.73 U1_UDAS5.36@5589.44,2706.16
NetC7_UDAS6_2: C7_UDAS6.2 U1_UDAS6.36 | length 125.5
  Bottom Layer w10: C7_UDAS6.2@4531,2595 4531,2681.73 U1_UDAS6.36@4558.44,2709.16
NetC7_UDAS7_2: C7_UDAS7.2 U1_UDAS7.36 | length 125.5
  Bottom Layer w10: C7_UDAS7.2@3552,2598 3552,2684.73 U1_UDAS7.36@3579.44,2712.16
NetC7_UDAS8_2: C7_UDAS8.2 U1_UDAS8.36 | length 125.5
  Bottom Layer w10: C7_UDAS8.2@2543,2589 2543,2675.73 U1_UDAS8.36@2570.44,2703.16
NetC8_UDAS1_2: C8_UDAS1.2 U1_UDAS1.39 | length 171.7
  Bottom Layer w10: C8_UDAS1.2@6402,2695 6500,2695 6523,2718 6522.76,2718 U1_UDAS1.39@6551.68,2746.92
NetC8_UDAS2_2: C8_UDAS2.2 U1_UDAS2.39 | length 171.7
  Bottom Layer w10: C8_UDAS2.2@7402,2696 7500,2696 7523,2719 7522.76,2719 U1_UDAS2.39@7551.68,2747.92
NetC8_UDAS3_2: C8_UDAS3.2 U1_UDAS3.39 | length 171.7
  Bottom Layer w10: C8_UDAS3.2@8392,2689 8490,2689 8513,2712 8512.76,2712 U1_UDAS3.39@8541.68,2740.92
NetC8_UDAS4_2: C8_UDAS4.2 U1_UDAS4.39 | length 171.7
  Bottom Layer w10: C8_UDAS4.2@9363,2694 9461,2694 9484,2717 9483.76,2717 U1_UDAS4.39@9512.68,2745.92
NetC8_UDAS5_2: C8_UDAS5.2 U1_UDAS5.39 | length 171.7
  Bottom Layer w10: C8_UDAS5.2@5398,2696 5496,2696 5519,2719 5518.76,2719 U1_UDAS5.39@5547.68,2747.92
NetC8_UDAS6_2: C8_UDAS6.2 U1_UDAS6.39 | length 171.7
  Bottom Layer w10: C8_UDAS6.2@4367,2699 4465,2699 4488,2722 4487.76,2722 U1_UDAS6.39@4516.68,2750.92
NetC8_UDAS7_2: C8_UDAS7.2 U1_UDAS7.39 | length 171.7
  Bottom Layer w10: C8_UDAS7.2@3388,2702 3486,2702 3509,2725 3508.76,2725 U1_UDAS7.39@3537.68,2753.92
NetC8_UDAS8_2: C8_UDAS8.2 U1_UDAS8.39 | length 171.7
  Bottom Layer w10: C8_UDAS8.2@2379,2693 2477,2693 2500,2716 2499.76,2716 U1_UDAS8.39@2528.68,2744.92
NetC9_UDAS1_2: C9_UDAS1.2 U1_UDAS1.44 U1_UDAS1.45 | length 165.6
  Bottom Layer w10: C9_UDAS1.2@6342,2855 6392,2805 6442.73,2805 6454.24,2816.52 U1_UDAS1.44@6482.08,2816.52
NetC9_UDAS2_2: C9_UDAS2.2 U1_UDAS2.44 U1_UDAS2.45 | length 165.6
  Bottom Layer w10: C9_UDAS2.2@7342,2856 7392,2806 7442.73,2806 7454.24,2817.52 U1_UDAS2.44@7482.08,2817.52
NetC9_UDAS3_2: C9_UDAS3.2 U1_UDAS3.44 U1_UDAS3.45 | length 165.6
  Bottom Layer w10: C9_UDAS3.2@8332,2849 8382,2799 8432.73,2799 8444.24,2810.52 U1_UDAS3.44@8472.08,2810.52
NetC9_UDAS4_2: C9_UDAS4.2 U1_UDAS4.44 U1_UDAS4.45 | length 165.6
  Bottom Layer w10: C9_UDAS4.2@9303,2854 9353,2804 9403.73,2804 9415.24,2815.52 U1_UDAS4.44@9443.08,2815.52
NetC9_UDAS5_2: C9_UDAS5.2 U1_UDAS5.44 U1_UDAS5.45 | length 165.6
  Bottom Layer w10: C9_UDAS5.2@5338,2856 5388,2806 5438.73,2806 5450.24,2817.52 U1_UDAS5.44@5478.08,2817.52
NetC9_UDAS6_2: C9_UDAS6.2 U1_UDAS6.44 U1_UDAS6.45 | length 165.6
  Bottom Layer w10: C9_UDAS6.2@4307,2859 4357,2809 4407.73,2809 4419.24,2820.52 U1_UDAS6.44@4447.08,2820.52
NetC9_UDAS7_2: C9_UDAS7.2 U1_UDAS7.44 U1_UDAS7.45 | length 165.6
  Bottom Layer w10: C9_UDAS7.2@3328,2862 3378,2812 3428.73,2812 3440.24,2823.52 U1_UDAS7.44@3468.08,2823.52
NetC9_UDAS8_2: C9_UDAS8.2 U1_UDAS8.44 U1_UDAS8.45 | length 165.6
  Bottom Layer w10: C9_UDAS8.2@2319,2853 2369,2803 2419.73,2803 2431.24,2814.52 U1_UDAS8.44@2459.08,2814.52
NetC19_2: C19.2 C21.2 L2.2 U3.4
NetC20_2: C20.2 C22.2 L1.2 U3.9
NetC29_1: C29.1 U3.2 X1.3
NetC51_2: C51.2 U3.3 X1.1
NetC52_1: C52.1 U8.4 | length 80
  Top Layer w12: U8.4@3444.04,398.76 3499.39,398.76 C52.1@3516.8,416.17
NetC53_1: C53.1 U9.4 | length 80
  Top Layer w12: U9.4@3444.04,238.76 3499.39,238.76 C53.1@3516.8,256.17
NetC61_1: C61.1 C64.1 C65.1 C66.1 L3.2 L4.2 L6.2 Q3.S T1.1 U11.3 U11.7 U13.3 U13.7 | length 6233.7
  Top Layer w25: Q3.S@353.17,1766.17 Q3.S@353.17,1816.17 Q3.S@353.17,1866.17 701.8,1866.17 779,1943.37 779,1093.37 C61.1@656.8,971.17 681.63,996 1210,996 1232,974 1232,912 U13.3@1230,910 1228,908 1228,871.86 1265.86,834 1404,834 1430,860 1430,956 1454,980 1708,980 1766.8,1038.8 T1.1@1766.8,1066.17 ; C64.1@548.65,2241.17 548.65,2117.35 709.83,1956.17 C66.1@791.8,1956.17 995.83,1956.17 1054,1898 1053,1897 ; U11.3@1051.8,1771.17 1051.8,1895.8 1053,1897 ; U11.7@1251.8,1771.17 1251.8,1831.2 1211.5,1871.5 ; L6.2@2481.8,2345.05 L4.2@2041.8,2345.05 1555,2345.05 1555,2189 1237.5,1871.5 1211.5,1871.5 ; 1053,1897 1186,1897 1211.5,1871.5
  Top Layer w35: C64.1@548.65,2241.17 C65.1@548.65,2781.17
NetC63_1: C63.1 L5.2 L7.2 L8.2 R13.2 U10.5 | length 2211.1
  Top Layer w10: R13.2@2120,1644 2162.89,1686.89 2333.11,1686.89 2343,1677 2343,1618 U10.5@2300,1575 ; U10.5@2296.69,1587.31 U10.5@2303.31,1587.31
  Top Layer w25: U10.5@2296.69,1587.31 2337.83,1546.17 L5.2@2922.91,1546.17 ; C63.1@2686.8,1306.17 2921.75,1306.17 2922.91,1305 ; L8.2@2922.91,1066.17 2922.91,1305 ; L7.2@2922.91,2026.17 L5.2@2922.91,1546.17 ; 2922.91,1305 L5.2@2922.91,1546.17
NetC67_1: C67.1 R17.2 | length 183.2
  Top Layer w10: C67.1@957.8,1576.17 985.17,1576.17 1012.17,1603.17 1088.8,1603.17 R17.2@1117.8,1632.17
NetC67_2: C67.2 C68.2 U11.1 | length 221.5
  Top Layer w25: U11.1@951.8,1771.17 951.8,1638.17 C67.2@957.8,1632.17 C68.2@1037.8,1632.17
NetC69_2: C69.2 L9.2 L10.2 L11.2 R22.1 U12.5 | length 2092.5
  Top Layer w12: v1(2006,537) 2082.95,460.05 L11.2@2086.8,460.05 2209.05,460.05 2304,555 2304,641.01 U12.5@2297.7,647.31 ; R22.1@2060,860 2060,824 v1(2061,823)
  Top Layer w50: C69.2@826.8,397.17 889.68,460.05 L9.2@1166.8,460.05 L10.2@1626.8,460.05 L11.2@2082.95,460.05
  POWER w12: v1(2006,537) 2006,768 v1(2061,823)
NetC73_1: C73.1 R25.2 | length 183.2
  Top Layer w10: C73.1@1121.8,696.17 1148.8,723.17 1252.8,723.17 R25.2@1281.8,752.17
NetC73_2: C73.2 C74.2 U13.1 | length 241.2
  Top Layer w15: U13.1@1130,910 1121.8,901.8 C73.2@1121.8,752.17 C74.2@1201.8,752.17
NetD1_1: D1.1 Q1.3
NetD1_2: D1.2 R1.1
NetD2_1: D2.1 Q2.3
NetD2_2: D2.2 R3.1
NetD3_A: D3.A L3.1 L4.1 L6.1 U11.5 | length 1809.3
  Top Layer w25: U11.5@1151.8,1771.17 1151.8,1714.2 1184,1682 1428,1682 1471,1639 1564.35,1639 D3.A@1577.35,1626.01 1577.35,2001.72 L3.1@1601.8,2026.17 L4.1@2041.8,2026.17 L6.1@2481.8,2026.17
NetD4_2: D4.2 R19.2 | length 141.9
  Top Layer w25: D4.2@2580,360 2601.8,338.2 R19.2@2601.8,227.17
NetD5_2: D5.2 R20.2 | length 134
  Top Layer w25: R20.2@2721.8,217.17 D5.2@2721.8,351.17
NetD6_1: D6.1 R21.1 | length 150.5
  Top Layer w25: R21.1@2841.8,221.17 2861.8,241.17 D6.1@2861.8,363.37
NetD7_K: D7.K T1.2 | length 428
  Top Layer w35: D7.K@1640.8,761.17 1808.63,929 1846,929 1884.91,967.91 T1.2@1884.91,1066.17
NetDA1_11: DA1.11 RN4.8
NetDA1_12: DA1.12 RN4.7
NetDA1_13: DA1.13 RN4.6
NetDA1_14: DA1.14 RN4.5
NetDA1_15: DA1.15 RN4.2
NetDA1_16: DA1.16 RN3.7
NetDA1_17: DA1.17 RN3.4
NetDA1_18: DA1.18 RN3.3
NetDA1_19: DA1.19 RN3.2
NetDA1_20: DA1.20 RN3.1
NetESD1_1: ESD1.1 U3.7 USB1.2
NetESD1_2: ESD1.2 U3.8 USB1.3
NetF1_1: F1.1 VPWR1.2 | length 799.3
  Top Layer w100: VPWR1.2@276.8,211.17 458,392.37 458,700.32 F1.1@291.8,866.52
NetF1_2: F1.2 Q3.D TVS1.A | length 732.8
  Top Layer w25: F1.2@291.8,1535.81 356.84,1600.85 TVS1.A@654.99,1600.85
  Top Layer w35: Q3.D@201.8,1841.17 201.8,1703.2 291.8,1613.2 F1.2@291.8,1535.81
NetJO1_1: JO1.1 U3.43
NetJO2_1: JO2.1 U3.44
NetJO2_2: JO2.2 R10.2 U2.1
NetR2_1: R2.1 U3.6
NetR4_2: R4.2 U3.14
NetR5_1: R5.1 U3.38
NetR5_2: R5.2 U2.158
NetR6_1: R6.1 U3.39
NetR6_2: R6.2 U2.207
NetR7_1: R7.1 U3.41
NetR7_2: R7.2 U2.155
NetR8_1: R8.1 U3.61 U4.3
NetR8_2: R8.2 R9.2 U4.1
NetR11_2: R11.2 R12.1 U3.59
NetR13_1: R13.1 R14.2 U10.1 | length 241.7
  Top Layer w25: R13.1@2120,1700 2120,1768 2207.02,1855.02 U10.1@2257.7,1855.02
NetR15_1: R15.1 R16.2 U11.2 | length 402.4
  Top Layer w10: U11.2@1001.8,1771.17 1001.8,1693.2 1016,1679 1146,1679 1192.83,1632.17 R16.2@1197.8,1632.17 1253.8,1576.17 R15.1@1277.8,1576.17
NetR18_1: R18.1 R22.2 U12.1 | length 282.7
  Top Layer w15: R22.2@2060,916 2084,916 2133,867 2155.96,867 R18.1@2161.8,861.17 2181.17,861.17 2235.02,915.02 U12.1@2297.7,915.02
NetR23_1: R23.1 R24.2 U13.6 | length 413.1
  Top Layer w10: v1(1360,789) 1360,786 1363,783 1361.8,781.8 R24.2@1361.8,752.17 1417.8,696.17 R23.1@1441.8,696.17 ; v1(1378,981) 1378,912 U13.6@1380,910
  POWER w10: v1(1360,789) 1378,807 v1(1378,981)
NetT1_3: T1.3 U13.5 | length 897.2
  Top Layer w35: U13.5@1330,910 1330,999 1402,1071 1597,1071 1891,1365 1891,1452 T1.3@1884.91,1458.09
NetU2_157: U2.157 U3.40
NetU3_62: U3.62 U4.4
NetU3_63: U3.63 U4.5
OE#: U2.190 U3.33
OS0: U1_UDAS1.3 U1_UDAS2.3 U1_UDAS3.3 U1_UDAS4.3 U1_UDAS5.3 U1_UDAS6.3 U1_UDAS7.3 U1_UDAS8.3 U2.94
OS1: U1_UDAS1.4 U1_UDAS2.4 U1_UDAS3.4 U1_UDAS4.4 U1_UDAS5.4 U1_UDAS6.4 U1_UDAS7.4 U1_UDAS8.4 U2.96
OS2: U1_UDAS1.5 U1_UDAS2.5 U1_UDAS3.5 U1_UDAS4.5 U1_UDAS5.5 U1_UDAS6.5 U1_UDAS7.5 U1_UDAS8.5 U2.98
PWREN#: U2.183 U3.60
RANGE1: U1_UDAS8.8 U2.106
RANGE2: U1_UDAS7.8 U2.107
RANGE3: U1_UDAS6.8 U2.108
RANGE4: U1_UDAS5.8 U2.109
RANGE5: U1_UDAS1.8 U2.112
RANGE6: U1_UDAS2.8 U2.113
RANGE7: U1_UDAS3.8 U2.115
RANGE8: U1_UDAS4.8 U2.116
RD#: U2.193 U3.28
RXF#: U2.185 U3.26
SIG1: CON1.1 U2.128
SIG2: CON1.2 U2.132
SIG3: CON1.3 U2.133
SIG4: CON1.4 U2.134
SIG5: CON1.5 U2.135
SIG6: CON1.6 U2.137
SIG7: CON1.7 U2.138
SIG8: CON1.8 U2.139
SIG9: CON1.9 U2.140
SIG10: CON1.10 U2.144
SIG11: CON1.11 U2.145
SIG12: CON1.12 U2.146
SIG13: CON1.13 U2.147
SIWUA: U2.189 U3.30
STATLED0: Q1.2 U2.102
STATLED1: Q2.2 U2.47
SUSPEND#: U3.36
TXE#: U2.186 U3.27
USR1: RN1.4 SW1.20 U2.6
USR2: RN1.3 SW1.19 U2.14
USR3: RN1.2 SW1.18 U2.26
USR4: RN1.1 SW1.17 U2.32
USR5: RN1.8 SW1.16 U2.43
USR6: RN2.4 SW1.15 U2.51
USR7: RN2.3 SW1.14 U2.20
USR8: RN2.2 SW1.13 U2.48
USR9: RN2.1 SW1.12 U2.49
USR10: RN2.8 SW1.11 U2.50
USR11: CON10.1 U2.45
USR12: CON10.2 U2.3
USR13: CON10.3 U2.2
USR14: CON10.4 U2.5
USR15: CON10.5 U2.4
USR16: CON10.6 U2.9
USR17: CON10.7 U2.8
USR18: CON10.8 U2.12
USR19: CON10.9 U2.11
USR20: CON10.10 U2.16
USR21: CON10.11 U2.15
USR22: CON10.12 U2.19
USR23: CON10.13 U2.18
USR24: CON10.14 U2.23
USR25: CON10.15 U2.22
USR26: CON10.16 U2.25
USR27: CON10.17 U2.24
USR28: CON10.18 U2.29
USR29: CON10.19 U2.28
USR30: CON10.20 U2.31
USR31: CON10.22 U2.30
USR32: RN1.7 S1.1 S1.2 U2.41
VBUS: R11.1 USB1.1
VIN1: CON2.2 U1_UDAS8.49 | length 214.5
  Bottom Layer w8: CON2.2@2220,3046.93 2328.28,3046.93 U1_UDAS8.49@2403.4,2971.81
VIN2: CON2.4 U1_UDAS8.51 | length 263.4
  Bottom Layer w8: CON2.4@2220,3125.67 2305.22,3125.67 U1_UDAS8.51@2431.24,2999.64
VIN3: CON2.6 U1_UDAS8.53 | length 312.4
  Bottom Layer w8: CON2.6@2220,3204.41 2282.15,3204.41 U1_UDAS8.53@2459.08,3027.48
VIN4: CON2.8 U1_UDAS8.55 | length 361.3
  Bottom Layer w8: CON2.8@2220,3283.15 2259.09,3283.15 U1_UDAS8.55@2486.92,3055.32
VIN5: CON2.10 U1_UDAS8.57 | length 433.6
  Bottom Layer w8: CON2.10@2220,3361.89 2273.11,3361.89 2440,3195 2440,3155 2511.84,3083.16 U1_UDAS8.57@2514.76,3083.16
VIN6: CON2.12 U1_UDAS8.59 | length 491.6
  Bottom Layer w8: CON2.12@2220,3440.63 2268.37,3440.63 2471,3238 2471,3182.6 U1_UDAS8.59@2542.6,3111
VIN7: CON2.14 U1_UDAS8.61 | length 546.6
  Bottom Layer w8: CON2.14@2220,3519.37 2255.63,3519.37 2503,3272 2503,3206.27 U1_UDAS8.61@2570.44,3138.84
VIN8: CON2.16 U1_UDAS8.63 | length 592.3
  Bottom Layer w8: CON2.16@2220,3598.11 2227.06,3598.11 2525,3300.17 2525,3239.95 U1_UDAS8.63@2598.27,3166.68
VIN9: CON3.2 U1_UDAS7.49
VIN10: CON3.4 U1_UDAS7.51
VIN11: CON3.6 U1_UDAS7.53
VIN12: CON3.8 U1_UDAS7.55
VIN13: CON3.10 U1_UDAS7.57
VIN14: CON3.12 U1_UDAS7.59
VIN15: CON3.14 U1_UDAS7.61
VIN16: CON3.16 U1_UDAS7.63
VIN17: CON4.2 U1_UDAS6.49
VIN18: CON4.4 U1_UDAS6.51
VIN19: CON4.6 U1_UDAS6.53
VIN20: CON4.8 U1_UDAS6.55
VIN21: CON4.10 U1_UDAS6.57
VIN22: CON4.12 U1_UDAS6.59
VIN23: CON4.14 U1_UDAS6.61
VIN24: CON4.16 U1_UDAS6.63
VIN25: CON5.2 U1_UDAS5.49
VIN26: CON5.4 U1_UDAS5.51
VIN27: CON5.6 U1_UDAS5.53
VIN28: CON5.8 U1_UDAS5.55
VIN29: CON5.10 U1_UDAS5.57
VIN30: CON5.12 U1_UDAS5.59
VIN31: CON5.14 U1_UDAS5.61
VIN32: CON5.16 U1_UDAS5.63
VIN33: CON6.2 U1_UDAS1.49
VIN34: CON6.4 U1_UDAS1.51
VIN35: CON6.6 U1_UDAS1.53
VIN36: CON6.8 U1_UDAS1.55
VIN37: CON6.10 U1_UDAS1.57
VIN38: CON6.12 U1_UDAS1.59
VIN39: CON6.14 U1_UDAS1.61
VIN40: CON6.16 U1_UDAS1.63
VIN41: CON7.2 U1_UDAS2.49
VIN42: CON7.4 U1_UDAS2.51
VIN43: CON7.6 U1_UDAS2.53
VIN44: CON7.8 U1_UDAS2.55
VIN45: CON7.10 U1_UDAS2.57
VIN46: CON7.12 U1_UDAS2.59
VIN47: CON7.14 U1_UDAS2.61
VIN48: CON7.16 U1_UDAS2.63
VIN49: CON8.2 U1_UDAS3.49
VIN50: CON8.4 U1_UDAS3.51
VIN51: CON8.6 U1_UDAS3.53
VIN52: CON8.8 U1_UDAS3.55
VIN53: CON8.10 U1_UDAS3.57
VIN54: CON8.12 U1_UDAS3.59
VIN55: CON8.14 U1_UDAS3.61
VIN56: CON8.16 U1_UDAS3.63
VIN57: CON9.2 U1_UDAS4.49
VIN58: CON9.4 U1_UDAS4.51
VIN59: CON9.6 U1_UDAS4.53
VIN60: CON9.8 U1_UDAS4.55
VIN61: CON9.10 U1_UDAS4.57
VIN62: CON9.12 U1_UDAS4.59
VIN63: JC2.1 JO4.2 U1_UDAS4.61
VIN63_AFE: CON9.14 JO4.1
VIN63_SIG: JC2.2
VIN64: JC1.2 JO3.2 U1_UDAS4.63
VIN64_AFE: CON9.16 JO3.1
VIN64_SIG: CON1.15 JC1.1
WR: CON2.21 CON3.21 CON4.21 CON5.21 CON6.21 CON7.21 CON8.21 CON9.21 U2.90
WR#: U2.192 U3.29
pads on no net: CON1.0 CON1.16 CON2.0 CON3.0 CON4.0 CON5.0 CON6.0 CON7.0 CON8.0 CON9.0 CON10.0 RN1.5 RN1.6 RN2.5 RN2.6 RN2.7 RN3.5 RN3.6 RN3.8 RN4.1 RN4.3 RN4.4 U2.33 U2.34 U2.35 U2.36 U2.39 U2.40 U2.42 U2.136 U2.150 U2.151 U2.152 U2.153 U2.159 U2.169 U2.171 U2.172 U2.174 U2.175 U2.180 U2.181 U2.194 U2.204 U3.34 U3.45 U3.46 U3.48 U3.52 U3.53 U3.54 U3.55 U3.57 U3.58 U11.6 U13.2 USB1.0 USB1.4

## Polygon pours and split planes (outlines as drawn)
GND on GND "FGPA_GND" (solid, remove dead copper): 5436,2351 7846,2351 7846,5 7839,-2 7836,-5 5465,-5 5465,2322 5436,2351
GND on GND "PWR_GND" (solid, remove dead copper, pour order 1000): -4,3110 78,3110 1300,3110 1976,2434 1986,2424 2997,2424 3257,2424 3732,1949 3867,1814 3867,-5 0,-5 -4,-1 -4,3110

## Silkscreen, mask and mechanical layers (free items; w line width, h text height)
Mechanical 5:
  lines w5: -3688.2,861.17 -3438.2,861.17 ; 431.8,-4178.83 431.8,-4018.83 ; 431.8,5741.17 431.8,5901.17 ; 4681.8,-4268.83 4681.8,-4018.83 ; 4681.8,5991.17 4681.8,5741.17 ; 8931.8,-4178.83 8931.8,-4018.83 ; 8931.8,5741.17 8931.8,5901.17 ; 13051.8,861.17 12801.8,861.17 ; -3438.2,861.17 -3588.2,774.56 -3588.2,947.77 -3438.2,861.17 ; 4681.8,-4018.83 4768.4,-4168.83 4595.19,-4168.83 4681.8,-4018.83 ; 4681.8,5741.17 4768.4,5891.17 4595.19,5891.17 4681.8,5741.17 ; 12801.8,861.17 12951.8,774.56 12951.8,947.77 12801.8,861.17 ; -3438.2,-4018.83 12801.8,-4018.83 12801.8,5741.17 -3438.2,5741.17 -3438.2,-4018.83
  text "4" at -1735.06,5781.17 h120
  text "2" at 6770.41,5781.17 h120
  text "1" at 11029.72,5781.17 h120
  text "3" at 2519.45,5778.64 h120
  text "B" at -3574.83,3551.17 h120
  text "B" at 12865.17,3551.17 h120
  text "A" at -3589.25,-1948.83 h120
  text "A" at 12850.75,-1948.83 h120
  text "4" at -1735.06,-4178.83 h120
  text "2" at 6770.41,-4178.83 h120
  text "1" at 11029.72,-4178.83 h120
  text "3" at 2519.45,-4181.36 h120
Mechanical 7:
  circle w5: c250,3500 r62.5
  circle w5: c250,500 r62.5
  circle w5: c9750,500 r62.5
  circle w5: c9750,3500 r62.5
  circle w5: c937.5,2625 r62.5
  circle w5: c937.5,1125 r62.5
  circle w5: c2125,2625 r62.5
  circle w5: c2125,625 r62.5
  circle w5: c3125,2625 r62.5
  circle w5: c3125,625 r62.5
  circle w5: c4125,2625 r62.5
  circle w5: c4125,625 r62.5
  circle w5: c5125,2625 r62.5
  circle w5: c5125,625 r62.5
  circle w5: c6125,2625 r62.5
  circle w5: c6125,625 r62.5
  circle w5: c7125,2625 r62.5
  circle w5: c7125,625 r62.5
  circle w5: c8125,2625 r62.5
  circle w5: c8125,625 r62.5
  circle w5: c9125,2625 r62.5
  circle w5: c9125,625 r62.5
  lines w5: 5051.8,-3768.83 7801.8,-3768.83 12801.8,-3768.83 ; 5051.8,-3393.83 7801.8,-3393.83 ; 5051.8,-3018.83 7801.8,-3018.83 ; 5051.8,-2643.83 7801.8,-2643.83 ; 5051.8,-2268.83 7801.8,-2268.83 ; 5051.8,-1893.83 7801.8,-1893.83 ; 6801.8,-4018.83 6801.8,-1518.83 ; 7801.8,-4018.83 7801.8,-1518.83 ; 7801.8,-3268.83 12801.8,-3268.83 ; 7801.8,-2138.83 12801.8,-2138.83 ; 8301.8,-3768.83 8301.8,-3268.83 ; 8921.8,-4018.83 8921.8,-3768.83 ; 9301.8,-3768.83 9301.8,-3268.83 ; 10801.8,-4018.83 10801.8,-3768.83 ; 12301.8,-3768.83 12301.8,-3268.83 ; 0,0 0,4000 10000,4000 10000,0 0,0 ; 465.06,3592.52 465.06,3750 1409.94,3750 1409.94,3592.52 465.06,3592.52 ; 2046.26,3005 2046.26,3950 2203.74,3950 2203.74,3005 2046.26,3005 ; 3046.26,3005 3046.26,3950 3203.74,3950 3203.74,3005 3046.26,3005 ; 4046.26,3005 4046.26,3950 4203.74,3950 4203.74,3005 4046.26,3005 ; 5046.26,3005 5046.26,3950 5203.74,3950 5203.74,3005 5046.26,3005 ; 5051.8,-4018.83 5051.8,-1518.83 12801.8,-1518.83 12801.8,-4018.83 5051.8,-4018.83 ; 6046.26,3005 6046.26,3950 6203.74,3950 6203.74,3005 6046.26,3005 ; 7046.26,3005 7046.26,3950 7203.74,3950 7203.74,3005 7046.26,3005 ; 8046.26,3005 8046.26,3950 8203.74,3950 8203.74,3005 8046.26,3005 ; 9046.26,3005 9046.26,3950 9203.74,3950 9203.74,3005 9046.26,3005
  text "DRAWN" at 5081.8,-1648.83 h100
  text "CHECKED" at 5081.8,-2023.83 h100
  text "TITLE" at 7831.8,-2268.83 h100
  text "QA" at 5081.8,-2398.83 h100
  text "MFG" at 5081.8,-2773.83 h100
  text "APPROVED" at 5081.8,-3148.83 h100
  text "SIZE" at 7910.8,-3398.83 h100
  text "DWG NO" at 9331.8,-3398.83 h100
  text "REV" at 12429.23,-3398.83 h100
  text "SCALE" at 7831.8,-3898.83 h100

## Text inside footprints (layer, text, board x,y; h text height)
C54: Top Overlay "+" at 3556.8,516.17 h20 r270
C55: Top Overlay "+" at 3561.8,336.17 h20 r270
C58: Top Overlay "+" at 3716.8,736.17 h20 r270
C59: Top Overlay "+" at 3696.8,1116.17 h20 r270
C60: Top Overlay "+" at 3356.8,2076.17 h45 r270
C61: Top Overlay "+" at 721.8,861.17 h45 r90
C62: Top Overlay "+" at 2156.8,1301.17 h45
C63: Top Overlay "+" at 2621.8,1416.17 h45 r270
C64: Top Overlay "-" at 95.89,2349.43 h60 r180; Top Overlay "+" at 607.7,2300.22 h60
C65: Top Overlay "-" at 95.89,2889.43 h60 r180; Top Overlay "+" at 607.7,2840.22 h60
C66: Top Overlay "+" at 856.8,1846.17 h45 r90
C69: Top Overlay "+" at 891.8,91.17 h45 r90
C70: Top Overlay "+" at 2366.8,531.17 h45 r270
C71: Top Overlay "+" at 2150,1075 h45
TVS1: Top Overlay "A" at 596.68,1619.59 h50 r90; Top Overlay "C" at 596.68,1379.43 h50 r90